# Altium PCB PCB_power-channel-buck_2_2024-05-21.pcbdoc
Units mm, origin at the board's own origin, x right, y up, seen from the top; angles counter-clockwise.
Board outline 122 x 106.78 mm, 2 copper layers (Top Layer, Bottom Layer); 49 components, 27 nets, 131 pads, 83 vias.
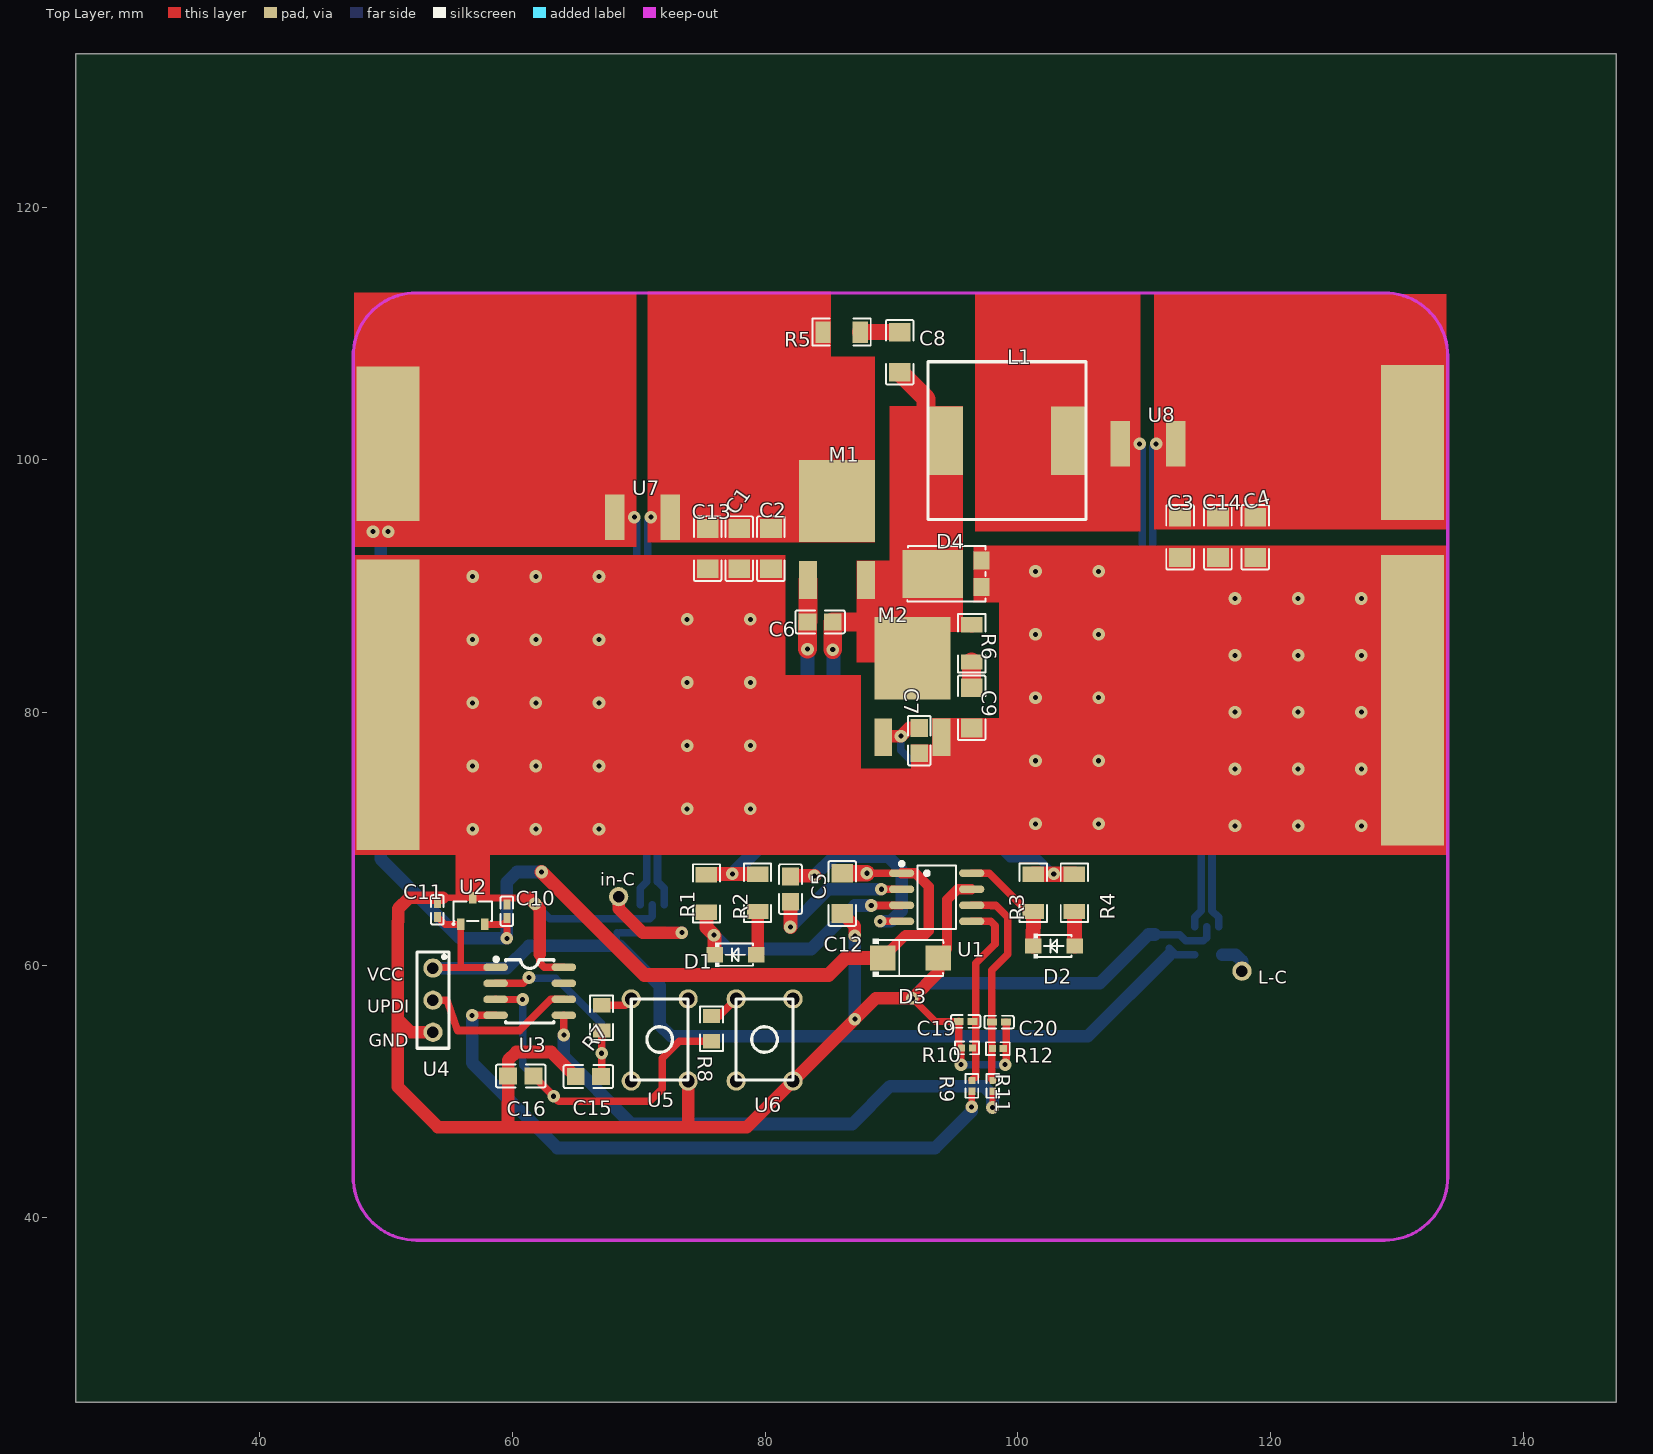
[diagram p0: Top Layer view]
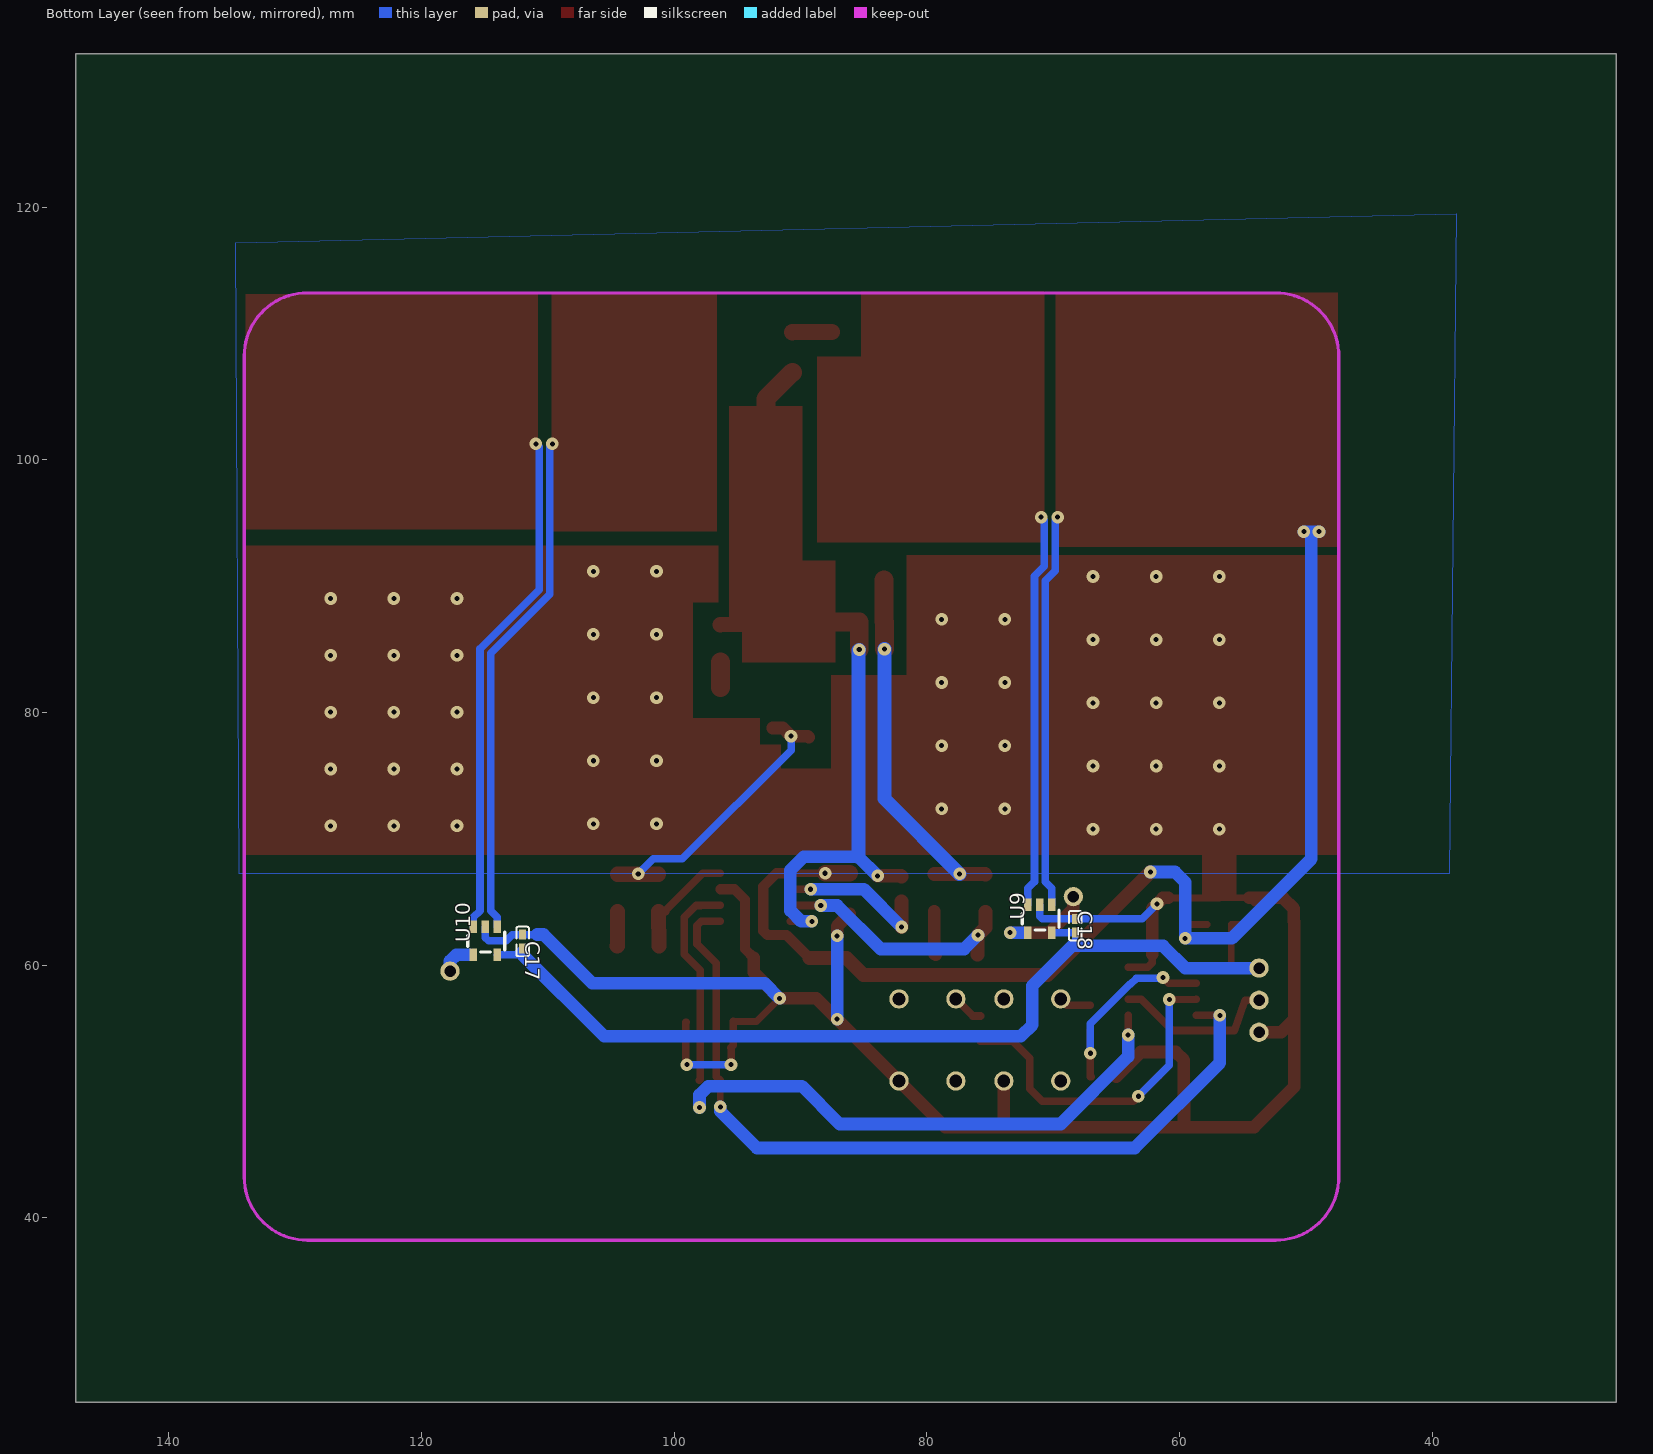
[diagram p1: Bottom Layer view, seen from below]

## Layer stack, top to bottom
Top Layer: signal copper (thickness not stored)
Dielectric: dielectric 0.32, FR-4, Dk 4.8
Bottom Layer: signal copper (thickness not stored)

## Board outline
147.4,25.4 25.4,25.4 25.4,132.177 147.4,132.177

## Components (designator, comment, footprint, x,y, rotation, side; value= is the part's Value field where it differs from the comment)
C1 "0.1u" C1206 77.95,92.977 r90 top
C2 "0.1u" C1206 80.45,92.977 r90 top
C3 "0.1u" C1206 112.85,93.877 r90 top
C4 "0.1u" C1206 118.8,93.877 r90 top
C5 "0.1u" C0805 82,66.028 r90 top
C6 "0.1u" C0805 84.35,87.177 r0 top
C7 "0.1u" C0805 92.2,77.777 r90 top
C8 "0.1u" C1206 90.65,108.527 r270 top
C9 "0.1u" C1206 96.35,80.377 r270 top
C10 "0.33u" C0402#1 59.549,64.278 r270 top
C11 "0.1u" C0402#1 54.049,64.378 r270 top
C12 "0.1u" C1206 86.1,65.677 r90 top
C13 "0.1u" C1206 75.45,92.977 r270 top
C14 "0.1u" C1206 115.85,93.877 r90 top
C15 "0.1u" C0805 65.999,51.178 r0 top
C16 "0.1u" C0805 60.649,51.228 r0 top
C17 "0.1u" C0402#2 112,61.877 r90 bottom
C18 "0.1u" C0402#2 68.25,63.127 r90 bottom
C19 "0.1u" C0402#1 95.871,55.547 r0 top
C20 "0.1u" C0402#1 98.521,55.497 r180 top
D1 "P1N4148W" SOD-123FL_L2.8-W1.8-LS3.8-R-RD 77.65,60.828 r0 top
D2 "P1N4148W" SOD-123FL_L2.8-W1.8-LS3.8-R-RD 102.864,61.516 r0 top
D3 "SMAJ20A_C2989706" SMA_L4.3-W2.6-LS5.1-RD 91.5,60.576 r0 top
D4 "SVM1045V" TO-277B_3P-L6.1-W4.3-LS6.5-BR 95.2,90.977 r0 top
L1 "SRI1209" SRI1209 99.15,101.527 r0 top
M1 "P25B6EB_TO-252AA.." "P25B6EB TO-252AA" 85.685,96.744 r270 top
M2 "P25B6EB_TO-252AA.." "P25B6EB TO-252AA" 91.654,84.298 r270 top
R1 "1k" R1206 75.35,65.678 r90 top
R2 "1k" R1206 79.4,65.728 r90 top
R3 "1k" R1206 101.232,65.722 r90 top
R4 "1k" R1206 104.482,65.722 r90 top
R5 "1k" R1206 86.05,110.127 r0 top
R6 "1k" R1206 96.35,85.477 r270 top
R7 "1k" R0805 67.05,55.827 r270 top
R8 "1k" R0805 75.749,54.978 r270 top
R9 "1k" R0402 96.37,50.447 r270 top
R10 "1k" R0402 95.971,53.447 r0 top
R11 "1k" R0402 98.02,50.447 r90 top
R12 "1k" R0402 98.421,53.397 r180 top
U1 "UCC27201ADR COPY" "UCC27201ADR SOIC8" 93.6,65.377 r270 top
U2 "78L05 78L05" SOT-23-3_L2.9-W1.4-P1.90-LS2.6-BR 56.849,64.278 r270 top
U3 "ATTINY402-SSF COPY" "ATTINY402-SSF SOIC8" 61.449,57.928 r270 top
U4 "3pin_uart" 3PIN_UART 53.699,57.228 r270 top
U5 "pushBtn" "EL KUMANDA PUSH BUTTON" 69.4,57.327 r0 top
U6 "pushBtn" "EL KUMANDA PUSH BUTTON" 77.7,57.327 r0 top
U7 "PCh_shunt" PCH_SHUNT_FTPRNT 70.3,95.477 r0 top
U8 "PCh_shunt" PCH_SHUNT_FTPRNT 110.3,101.277 r0 top
U9 "INA180B1IDBVR" SOT-23-5_L2.9-W1.6-P0.95-LS2.8-BR 71.05,63.677 r270 bottom
U10 "INA180B1IDBVR" SOT-23-5_L2.9-W1.6-P0.95-LS2.8-BR 114.949,61.928 r270 bottom

## Footprints (in the part's own frame and the unit in brackets; to place one, negate y for a bottom-side part, rotate by r counter-clockwise, add the part's x,y. Pads: shape width x height; smd on the part's side, far side on the other; paste and mask are expansions set on the pad)
3PIN_UART [mil]
  round 60 hole 36 paste+0 mask+2: 1(-100,0) 2(0,0) 3(100,0)
  silkscreen extent -150,-50 150,50
"ATTINY402-SSF SOIC8" [mm]
  oval 0.6x1.95 smd paste+0 mask+0.051: 1(-1.905,-2.794) 2(-0.635,-2.794) 3(0.635,-2.794) 4(1.905,-2.794) 5(1.905,2.616) 6(0.635,2.616) 7(-0.635,2.616) 8(-1.905,2.616)
  silkscreen extent -2.69,-2.91 2.5,1.82
C0402#1 [mm]
  rect 0.79x0.54 smd paste-100 mask+0.051: 1(-0.545,0) 2(0.545,0)
  silkscreen extent -1.17,-0.5 1.17,0.5
C0402#2 [mm]
  rect 0.79x0.54 smd paste-100 mask+0.051: 1(0.545,0) 2(-0.545,0)
  silkscreen extent -1.17,-0.5 1.17,0.5
C0805 [mm]
  rect 1.41x1.35 smd paste-100 mask+0.051: 1(-1,0) 2(1,0)
  silkscreen extent -1.96,-0.9 1.96,0.9
C1206 [mm]
  rect 1.485x1.728 smd paste-100 mask+0.051: 1(-1.593,0) 2(1.593,0)
  silkscreen extent -2.56,-1.09 2.56,1.09
"EL KUMANDA PUSH BUTTON" [mil]
  round 60 hole 39.37 paste+0 mask+2: 1(0,-255.9) 2(0,0) 3(177.16,-255.9) 4(177.16,0)
  silkscreen extent 0,-253 177,0
"P25B6EB TO-252AA" [mm]
  rect 3x1.4 smd paste+0 mask+0.051: 1(6.25,-2.3) 3(6.25,2.3)
  rect 6.5x6 smd paste+0 mask+0.051: 4(0,0)
PCH_SHUNT_FTPRNT [mm]
  rect 1.55x3.6 smd paste+0 mask+0.051: 1(-2.2,0) 2(2.2,0)
R0402 [mm]
  rect 0.566x0.54 smd paste-100 mask+0.051: 1(-0.433,0) 2(0.433,0)
  silkscreen extent -0.94,-0.5 0.94,0.5
R0805 [mm]
  rect 1.133x1.377 smd paste-100 mask+0.051: 1(-1,0) 2(1,0)
  silkscreen extent -1.76,-0.92 1.76,0.92
R1206 [mm]
  rect 1.208x1.701 smd paste-100 mask+0.051: 1(-1.479,0) 2(1.479,0)
  silkscreen extent -2.31,-1.08 2.31,1.08
SMA_L4.3-W2.6-LS5.1-RD [mm]
  rect 2x2 smd paste+0 mask+0.051: 1(-2.2,0) 2(2.2,0)
  silkscreen extent -2.98,-1.5 2.6,1.5
SOD-123FL_L2.8-W1.8-LS3.8-R-RD [mm]
  rect 1.3x1.2 smd paste+0 mask+0.051: 1(1.65,0) 2(-1.65,0)
  silkscreen extent -1.6,-0.95 1.38,0.95
SOT-23-3_L2.9-W1.4-P1.90-LS2.6-BR [mm]
  rect 0.91x0.6 smd paste+0 mask+0.051: 1(1.055,-0.955) 2(1.055,0.955) 3(-1.055,0)
  silkscreen extent -0.78,-1.6 1.09,1.53
SOT-23-5_L2.9-W1.6-P0.95-LS2.8-BR [mm]
  rect 1x0.6 smd paste+0 mask+0.05: 1(-1.1,0.95) 2(-1.1,0) 3(-1.1,-0.95) 4(1.1,-0.95) 5(1.1,0.95)
  silkscreen extent -0.7,-1.4 0.89,1.52
SRI1209 [mm]
  rect 2.8x5.4 smd paste+0 mask+0.051: 1(-4.9,0) 2(4.9,0)
  silkscreen extent -6.25,-6.25 6.25,6.25
TO-277B_3P-L6.1-W4.3-LS6.5-BR [mm]
  rect 1.29x1.422 smd paste+0 mask+0.051: 1(1.933,-1.05) 2(1.933,1.05)
  rect 4.8x3.8 smd paste+0 mask+0.051: 3(-1.933,0)
  silkscreen extent -3.95,-2.2 2.25,2.2
"UCC27201ADR SOIC8" [mm]
  oval 0.6x2 smd paste+0 mask+0.051: 1(-1.905,-2.794) 2(-0.635,-2.794) 3(0.635,-2.794) 4(1.905,-2.794) 5(1.905,2.751) 6(0.635,2.751) 7(-0.635,2.751) 8(-1.905,2.751)
  silkscreen extent -2.8,-2.94 2.53,1.5

## Free pads (board coordinates)
  round 1.524 hole 0.914 paste+0 mask+0.051: 1(117.75,59.527)
  rect 5x12.25 smd paste+0 mask+0.05: 5(50.15,101.277) 5(131.25,101.377)
  rect 5x23 smd paste+0 mask+0.05: 5(50.15,80.627) 5(131.25,80.977)
  round 1.524 hole 0.914 paste+0.102 mask+0.051: 8(68.4,65.426)

## Via types
v1: diameter 1, hole 0.4, Top Layer to Bottom Layer, tented both sides, 83 vias

## Nets (pads, with @x,y where several pads share a name; then routed paths per layer and width w, separated by ;. In a path a pad name is that pad's centre, name@x,y a point inside that pad or via, vN(x,y) a via of type N, cw(c..) or ccw(c..) an arc to the next point about the centre after c; other vN are vias at no path point)
+5V: C11.2 C17.2 C18.2 U2.1 U3.1 U4.1 U9.5 U10.5 | length 81.8
  Top Layer w0.54: U4.1@53.699,59.767 53.76,59.828 U3.1@58.654,59.828 ; C11.2 54.659,63.223 U2.1 ; 55.898,59.828 U2.1@55.898,63.224
  Bottom Layer w0.54: 68.25,61.527 C18.2@68.25,62.581
  Bottom Layer w0.6: C18.2@68.5,62.577 69.05,62.577 U9.5@70.1,62.581 ; C17.2 112.504,60.828 U10.5
  Bottom Layer w1: U4.1@53.699,59.767 59.541,59.767 61.301,61.527 68.499,61.527 71.649,58.377 71.649,55.276 72.551,54.377 105.55,54.377 111.999,60.826
C9_1: C9.1 R6.2 | length 2
  Top Layer w1.5: C9.1 R6.2
D1_1: D1.1 R2.1 | length 3.5
  Top Layer w1: D1.1 79.4,60.928 R2.1
D2_1: D2.1 R4.1 | length 2.7
  Top Layer w1.2: R4.1 104.482,61.548 D2.1
GND: C1.1 C2.1 C3.1 C4.1 C7.1 C9.2 C10.1 C11.1 C12.1 C13.2 C14.1 C15.1 C16.1 C17.1 C18.1 C19.1 C20.1 D3.2 D4.1 D4.2 M2.3 pad.5@50.15,80.627 pad.5@131.25,80.977 R10.1 R12.1 U1.7 U2.3 U3.8 U4.3 U5.3 U6.3 U9.2 U10.2 | length 170.7
  Top Layer w0.54: C11.1 54.459,65.333 U2.3 ; U2.3@56.849,65.328 61.15,65.328 ; v1(91.65,57.377) 93.48,55.547 C19.1
  Top Layer w0.6: 62.15,60.878 62.15,60.177 62.498,59.827 U3.8 ; C19.1 95.326,53.66 R10.1 ; v1(95.5,52.127) 95.5,53.407 R10.1@95.54,53.448 ; v1(99,52.127) 99.1,52.677 99.1,55.464 C20.1
  Top Layer w0.8: D3.2 94.4,61.276 94.4,65.177 95.235,66.012 U1.7
  Top Layer w1: U4.3@53.7,54.688 51.95,54.678 50.898,55.727 ; 54.459,65.333 51.805,65.333 50.949,64.478 50.949,63.477 50.898,63.428 50.898,55.727 ; 59.638,47.178 C16.1@59.648,51.229 ; C16.1 59.649,52.478 60.299,53.128 63.049,53.128 C15.1 ; 60.878,65.328 61.3,65.328 v1(61.774,64.854) 62.15,64.478 62.15,63.327 62.15,60.878 ; U5.3@73.9,50.827 73.9,47.292 74.015,47.178 ; C12.1 87.1,63.085 v1(87.1,62.327) ; D3.2 93.7,59.427 v1(91.65,57.377) 88.75,57.377 82.2,50.827 78.551,47.178 54.099,47.178 50.898,50.379 50.898,55.727
  Bottom Layer w0.6: v1(61.774,64.854) 62.956,63.672 C18.1 69.295,63.672 69.3,63.677 70.85,63.677 71.05,63.877 U9.2 ; v1@95.52,52.197 95.59,52.127 v1(99,52.127) ; 110.549,62.426 C17.1@111.999,62.421 ; C17.1 112.805,62.422 113.3,61.927 114.7,61.927 114.949,62.177 U10.2
  Bottom Layer w1: v1(87.1,55.727) 87.1,58.927 v1(87.1,62.327) ; v1(91.65,57.377) 92.85,58.577 106.5,58.577 110.349,62.426 110.856,62.429
  other v1: 56.841,70.769 61.841,70.769 66.841,70.769 117.2,71.027 122.2,71.027 127.2,71.027 101.406,71.186 106.406,71.186 73.826,72.375 78.826,72.375 117.2,75.527 122.2,75.527 127.2,75.527 56.841,75.769 61.841,75.769 66.841,75.769 101.406,76.186 106.406,76.186 73.826,77.375 78.826,77.375 117.2,80.027 122.2,80.027 127.2,80.027 56.841,80.769 61.841,80.769 66.841,80.769 101.406,81.186 106.406,81.186 73.826,82.375 78.826,82.375 117.2,84.527 122.2,84.527 127.2,84.527 56.841,85.769 61.841,85.769 66.841,85.769 101.406,86.186 106.406,86.186 73.826,87.375 78.826,87.375 117.2,89.027 122.2,89.027 127.2,89.027 56.841,90.769 61.841,90.769 66.841,90.769 101.406,91.185 106.406,91.185
H_SHUNT+: L1.2 U8.1 U10.1 | length 42
  Top Layer w0.6: U8.1 v1(109.65,101.277)
  Bottom Layer w0.6: v1(109.65,101.277) 109.846,101.081 109.846,89.373 114.522,84.696 114.522,64.305 113.999,63.782 U10.1
H_SHUNT-: C3.2 C4.2 C14.2 pad.5@131.25,101.377 U8.2 U10.3 | length 42.1
  Top Layer w0.6: v1(110.95,101.277) U8.2
  Bottom Layer w0.6: v1(110.95,101.277) 110.7,101.027 110.7,89.727 115.376,85.05 115.376,64.305 115.899,63.782 U10.3
HB: C5.1 U1.2 | length 12
  Top Layer w0.6: v1(89.2,66.012) U1.2
  Top Layer w1.1: v1(82,63.028) C5.1
  Bottom Layer w1: v1(82,63.028) 84.984,66.012 v1(89.2,66.012)
HI: C19.2 R9.1 R10.2 U1.5 | length 15
  Top Layer w0.6: U1.5 97.501,63.478 97.849,63.478 98.199,63.127 98.199,61.677 96.665,60.143 96.665,56.757 ; R9.1 96.665,51.175 96.665,56.758
HIGHGATE: C6.1 M1.1 R1.2 R2.2 | length 29.8
  Top Layer w1.1: R1.2 75.4,67.207 R2.2
  Top Layer w1.5: v1(83.35,85.027) C6.1 83.385,87.212 M1.1
  Bottom Layer w1.1: v1(77.4,67.227) 83.35,73.177 v1(83.35,85.027)
HO: D1.2 R1.1 U1.3 | length 20.4
  Top Layer w0.6: v1(88.4,64.727) 90.792,64.727 U1.3@90.806,64.741
  Top Layer w1.1: R1.1 75.35,62.978 v1(75.95,62.378) 75.999,62.328 D1.2
  Bottom Layer w1: v1(75.95,62.378) 77.05,61.277 83.65,61.277 87.1,64.727 v1(88.4,64.727)
HS: C5.2 C6.2 C8.2 D4.3 L1.1 M1.3 M2.4 R6.1 U1.4 | length 45.7
  Top Layer w0.6: v1(89.1,63.472) U1.4
  Top Layer w1.1: C5.2 82.049,67.077 v1(83.9,67.077)
  Top Layer w1.2: 94.801,86.978 R6.1@96.35,86.955
  Top Layer w1.5: v1@85.35,84.977 C6.2 88.2,87.177 88.3,87.277 ; C8.2 92.75,104.834 92.75,102.127
  Bottom Layer w1: v1(83.9,67.077) 85.4,68.577 89.75,68.577 90.8,67.527 90.8,64.327 89.945,63.472 v1(89.1,63.472)
  Bottom Layer w1.1: v1(85.35,84.977) 85.4,84.927 85.4,68.577
IN_SHUNT+: C10.2 C12.2 D3.1 pad.5@50.15,101.277 U1.1 U2.2 U7.1 U9.1 | length 128.5
  Top Layer w0.54: U2.2 59.249,63.223 59.549,63.523 C10.2 v1(59.55,62.128)
  Top Layer w0.6: v1(88.05,67.277) 89.299,67.277 cw(c89.299,67.276) 89.3,67.276 U1.1@90.806,67.281
  Top Layer w0.8: D3.1@89.3,60.576 91.101,62.377 92.6,62.377 92.95,62.727 92.95,66.227 91.895,67.282 U1.1
  Top Layer w1.1: v1(62.3,67.377) 70.45,59.227 85,59.227 86.349,60.576 D3.1@89.3,60.576
  Top Layer w1.3: C12.2@86.1,67.271 v1@88.05,67.276
  Bottom Layer w0.6: v1(69.65,95.477) 69.846,95.281 69.846,91.223 70.623,90.446 70.623,66.604 70.1,66.081 U9.1
  Bottom Layer w1: v1(48.95,94.327) v1(50.15,94.327) ; 49.551,94.326 49.551,68.428 55.85,62.129 59.548,62.129 59.551,66.576 60.351,67.377 v1(62.3,67.377)
IN_SHUNT-: C1.2 C2.2 C13.1 M1.4 R5.1 U7.2 U9.3 | length 31.3
  Bottom Layer w0.6: v1(70.95,95.477) 70.7,95.227 70.7,91.577 71.477,90.8 71.477,66.604 72,66.081 U9.3
LI: C20.2 R11.2 R12.2 U1.6 | length 16.7
  Top Layer w0.6: U1.6 97.9,64.727 98.25,64.727 99.2,63.777 99.2,60.877 97.935,59.612 97.935,50.963 R11.2@98.019,50.879
LO: D2.2 R3.1 U1.8 | length 9.4
  Top Layer w0.6: U1.8 97.745,67.282 100.783,64.243 R3.1 R3.1@100.661,64.243
  Top Layer w1.2: D2.2 R3.1
LOWGATE: C7.2 M2.1 R3.2 R4.2 | length 23.7
  Top Layer w1: M2.1 89.433,78.127 v1(90.75,78.127) 91.4,78.777 C7.2@92.2,78.777
  Top Layer w1.2: R3.2 R4.2
  Bottom Layer w0.6: v1(90.75,78.127) 90.75,77.027 99.35,68.427 101.65,68.427 v1(102.85,67.227)
PA0: U3.6 U4.2 | length 13.1
  Top Layer w0.6: U4.2@53.699,57.227 54.8,57.227 55.65,54.827 60.549,54.826 63.015,57.293 U3.6@64.064,57.293
PA6: C15.2 R7.2 U3.2 | length 16.1
  Top Layer w0.6: U3.2 60.835,58.563 v1(61.3,59.027) ; C15.2 67.05,51.178 v1(67.05,53.027) R7.2
  Bottom Layer w0.6: v1(61.3,59.027) 61.349,58.977 63.4,58.977 63.9,58.477 63.95,58.477 67.05,55.377 v1(67.05,53.027)
PA7: C16.2 R8.2 U3.3 | length 29.1
  Top Layer w0.6: U3.3 v1(60.799,57.278) ; C16.2@61.65,51.229 v1(63.253,49.623) v1@63.598,49.278 ; v1@63.597,49.279 63.648,49.228 70.851,49.228 71.849,50.226 71.849,52.627 73.198,53.978 ; 73.199,53.978 R8.2
  Bottom Layer w0.6: v1(60.799,57.278) 60.799,52.077 v1(63.253,49.623)
R5_2: C8.1 R5.2 | length 3.1
  Top Layer w1.3: R5.2 C8.1
R7_1: R7.1 U5.2 | length 2.6
  Top Layer w0.6: R7.1 68.9,56.827 U5.2
R8_1: R8.1 U6.2 | length 2.5
  Top Layer w0.6: R8.1 76.351,55.978 U6.2@77.7,57.327
S$34628: pad.1 | length 2.6
  Bottom Layer w1: 116.2,60.827 117.249,60.826 117.75,60.328 pad.1
S$34656: pad.8 | length 6.7
  Top Layer w1: pad.8 68.4,64.476 70.3,62.576 v1@73.399,62.576
  other v1: 73.4,62.577
U3_4: R9.2 U3.4 | length 50.7
  Top Layer w0.5: v1(96.35,48.777) 96.35,49.994 R9.2
  Top Layer w0.6: v1(56.8,56.022) U3.4
  Bottom Layer w1: v1(56.8,56.022) 56.8,52.276 63.549,45.527 93.45,45.527 96.35,48.427 v1(96.35,48.777)
U3_5: R11.1 U3.5 | length 43.2
  Top Layer w0.5: v1(98,48.727) 98,49.994 R11.1
  Top Layer w0.6: v1(64.066,54.477) U3.5
  Bottom Layer w1: v1(64.066,54.477) 64.066,52.761 69.4,47.427 86.9,47.427 89.9,50.427 97.3,50.427 98,49.727 v1(98,48.727)
pads on no net: U3.7 U5.1 U5.4 U6.1 U6.4 U9.4 U10.4
copper on no net: | length 1
  Bottom Layer w1: 72.35,62.577 73.4,62.577

## Polygon pours and split planes (outlines as drawn)
GND on Bottom Layer (solid): 38.65,67.227 132.1,67.227 134.45,67.227 134.7,117.177 38.1,119.477

## Keep-outs
Keep-Out Layer:
  lines w0.254: 47.382,43.227 ccw(c52.382,43.227) 52.382,38.227 ; 47.382,108.227 cw(c52.382,108.227) 52.382,113.227 ; 129.047,38.227 ccw(c129.047,43.227) 134.047,43.227 ; 129.047,113.227 cw(c129.047,108.227) 134.047,108.227

## Other copper
Top Layer:
  rectangle net HS: 89.85,86.377 95.65,104.277
  rectangle net HS: 87.25,83.977 94.65,92.027
  rectangle net GND: 96.5,88.727 124.95,93.227
  rectangle net GND: 98.5,73.627 133.95,93.227
  rectangle net H_SHUNT-: 110.8,94.477 133.95,113.127
  rectangle net H_SHUNT+: 96.6,94.327 109.7,113.177
  rectangle net IN_SHUNT-: 70.7,93.477 88.7,108.177
  rectangle net GND: 47.5,68.727 81.6,92.477
  rectangle net IN_SHUNT+: 47.45,93.127 69.8,113.277
  rectangle net GND: 80.15,68.727 87.6,82.977
  rectangle net GND: 86.5,68.727 133.95,75.577
  rectangle net GND: 98.5,72.827 133.95,75.227
  rectangle net GND: 93.2,73.027 98.5,79.577
  rectangle net GND: 55.5,65.327 58.2,70.077
  rectangle net GND: 91.55,74.827 94.5,77.477
  rectangle net IN_SHUNT-: 70.7,107.827 85.2,113.327

## Silkscreen, mask and mechanical layers (free items; w line width, h text height)
Top Overlay:
  text "in-C" at 66.95,66.277 h1
  text "L-C" at 119.05,58.527 h1

## Text inside footprints (layer, text, board x,y; h text height)
U4: Top Overlay "UPDI" at 48.493,56.219 h1; Top Overlay "VCC" at 48.493,58.759 h1; Top Overlay "GND" at 48.62,53.552 h1